# Altium PCB BMS Resistor Ladder Companion.PcbDoc
Units mm, origin at the board's own origin, x right, y up, seen from the top; angles counter-clockwise.
Board outline 50 x 75 mm, 2 copper layers (L1 - Primary, L2 - Secondary), stack 1.57 mm thick; 37 components, 34 nets, 123 pads, 0 vias.
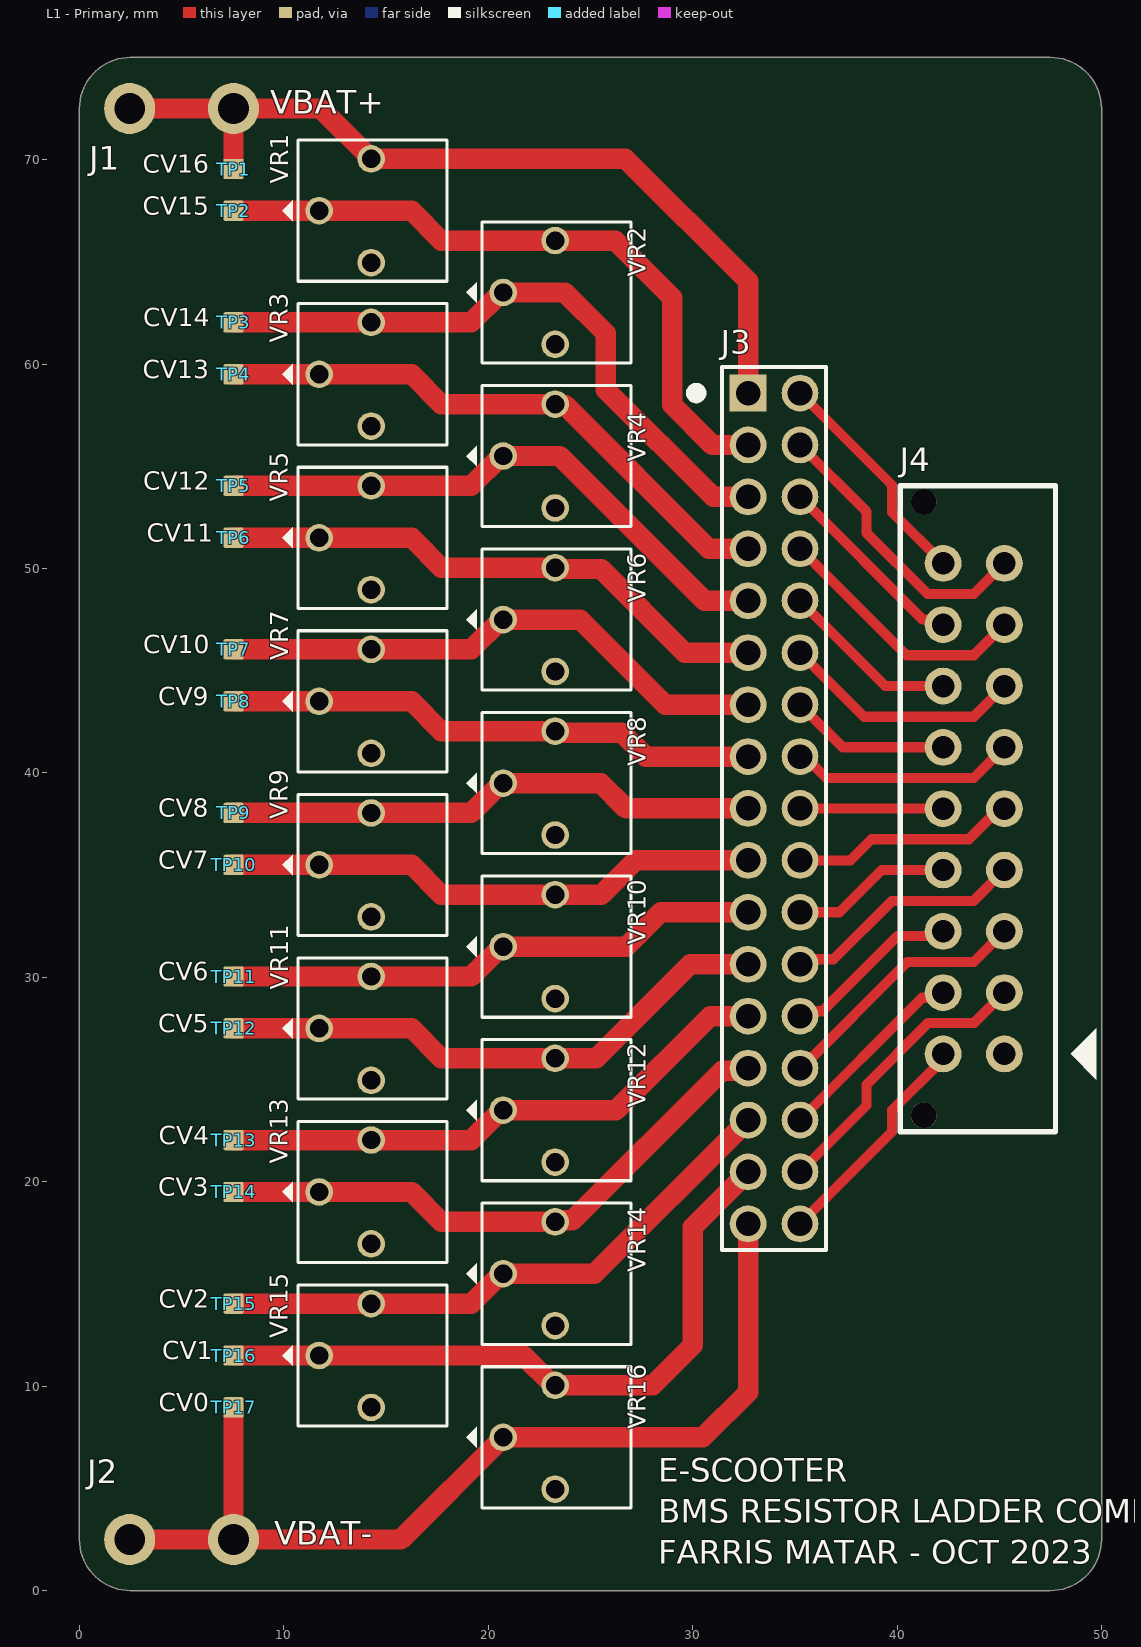
[diagram p0: L1 - Primary view]
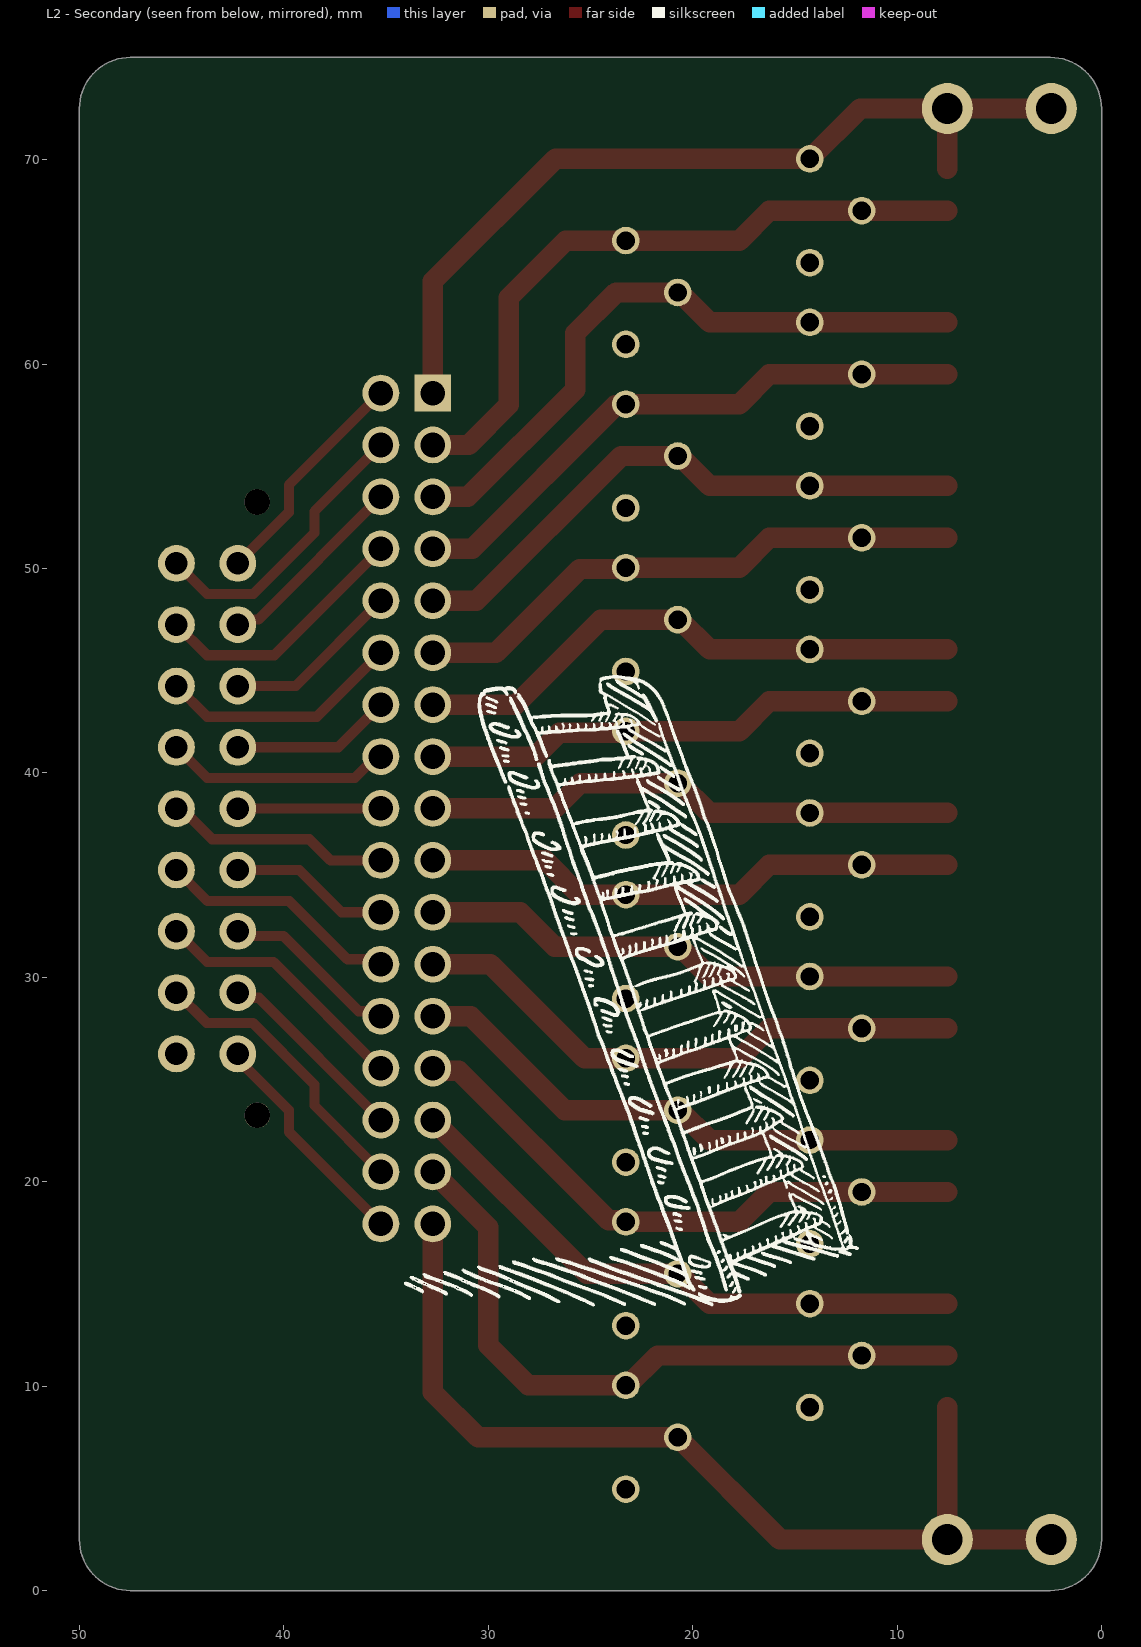
[diagram p1: L2 - Secondary view, seen from below]
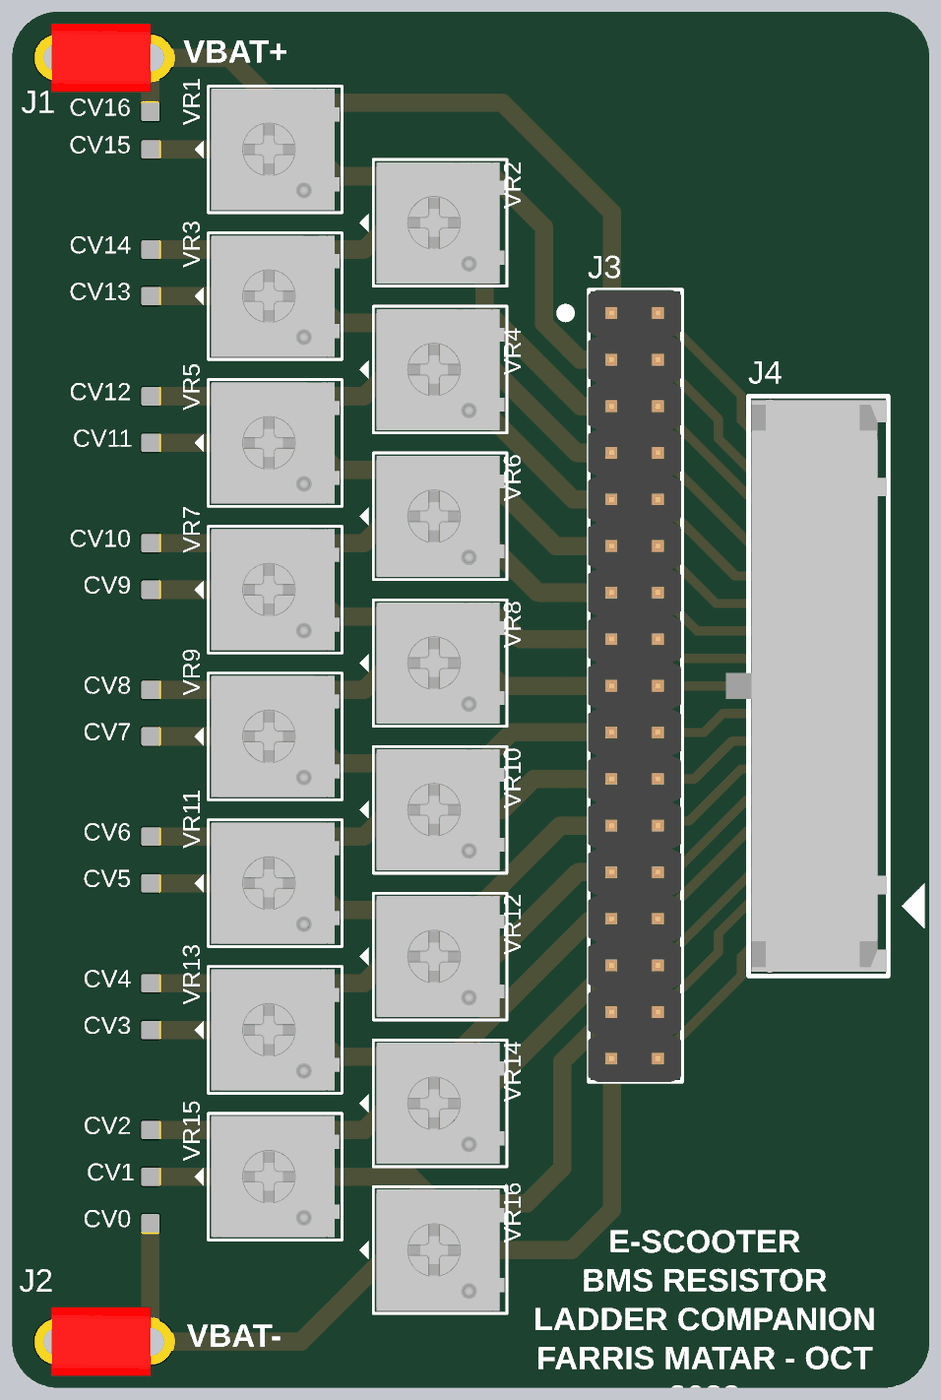
[diagram p2: 3D render of the assembled board from above, using the file's embedded part models]

## Layer stack, top to bottom
Top Solder: solder mask 0.0127, Solder Resist, Dk 3.8
L1 - Primary: signal copper 0.035
Dielectric: core 1.5, FR-4, Dk 4.5
L2 - Secondary: signal copper 0.035
Bottom Solder: solder mask 0.0127, Solder Resist, Dk 3.8

## Board outline
0,2.5 0,72.5 cw(c2.5,72.5) 2.5,75 47.5,75 cw(c47.5,72.5) 50,72.5 50,2.5 cw(c47.5,2.5) 47.5,0 2.5,0 cw(c2.5,2.5)

## Design rules (kind name [scope] priority, off if disabled: settings)
BoardOutlineClearance [All] p1: gap=0.2 ignorepadtopadclearanceinfootprint=FALSE
Clearance ClearanceNetTie [HasFootprint('NET_TIE') vs HasFootprint('NET_TIE')] p1: gap=0 ignorepadtopadclearanceinfootprint=FALSE
Clearance ClearanceTopLayer [OnLayer('L1 - Primary') Or IsVia Or IsThruPin vs OnLayer('L1 - Primary') Or IsVia Or IsThruPin] p2: gap=0.2 ignorepadtopadclearanceinfootprint=FALSE except(0.25: SMDPad-Hole Fill-Hole Poly-Hole Region-Hole Text-Hole; 0.254: Arc-Via Arc-Hole Track-Via Track-Hole Via-Fill Via-Poly Via-Region Fill-Fill Fill-Poly Fill-Region Poly-Poly Poly-Region Region-Region; 0.33: Arc-THPad Track-THPad THPad-Fill THPad-Poly THPad-Region; 0.5: SMDPad-THPad THPad-THPad THPad-Via THPad-Hole Via-Via Via-Hole)
Clearance ClearanceBottomLayer [OnLayer('L2 - Secondary') Or IsVia Or IsThruPin vs OnLayer('L2 - Secondary') Or IsVia Or IsThruPin] p3: gap=0.2 ignorepadtopadclearanceinfootprint=FALSE except(0.25: SMDPad-Hole Fill-Hole Poly-Hole Region-Hole Text-Hole; 0.254: Arc-Via Arc-Hole Track-Via Track-Hole Via-Fill Via-Poly Via-Region Fill-Fill Fill-Poly Fill-Region Poly-Poly Poly-Region Region-Region; 0.33: Arc-THPad Track-THPad THPad-Fill THPad-Poly THPad-Region; 0.5: SMDPad-THPad THPad-THPad THPad-Via THPad-Hole Via-Via Via-Hole)
ComponentClearance [All] p1: gap=0.102 collisioncheckmode=3 verticalgap=0.102 showdistances=TRUE
DiffPairsRouting [All] p1: maxlimit=0.203 minlimit=0.203 mostfreqgap=0.203 toplayer_minwidth=0.203 toplayer_maxwidth=1816.048 toplayer_prefwidth=0.203 bottomlayer_minwidth=0.203 bottomlayer_maxwidth=1816.048 bottomlayer_prefwidth=0.203 maxuncoupledlength=12.7
Height [All] p1: minheight=0 maxheight=1816.048 prefheight=12.7
HoleSize [All] p1: absolutevalues=TRUE maxlimit=6.3 minlimit=0.2 maxpercent=80.000 minpercent=20.000
HoleToHoleClearance [All] p1: gap=0.25 allowstackedmicrovias=FALSE
MinimumAnnularRing [All] p1: minimumring=0.076
MinimumSolderMaskSliver [All] p1: minsoldermaskwidth=0.1
PolygonConnect PolygonConnect_1 [HasFootprint('TESTPOINT_CIRCLE_1MM') OR HasFootprint('TESTPOINT_SQUARE_1MM')] p1: connectstyle=Direct reliefconductorwidth=0.254 reliefentries=4 polygonreliefangle="90 Angle" airgapwidth=0.254
PolygonConnect [All] p2: thpad.connectstyle=Relief thpad.reliefconductorwidth=0.254 thpad.reliefentries=4 thpad.polygonreliefangle="90 Angle" thpad.airgapwidth=0.254 smdpad.connectstyle=Relief smdpad.reliefconductorwidth=0.254 smdpad.reliefentries=4 smdpad.polygonreliefangle="90 Angle" smdpad.airgapwidth=0.254 via.connectstyle=Direct via.reliefconductorwidth=0.254 via.reliefentries=4 via.polygonreliefangle="90 Angle" via.airgapwidth=0.254
RoutingVias [All] p1: holewidth=0.2 width=0.45 viastyle="Through Hole" minholewidth=0.2 minwidth=0.45 maxholewidth=6.3 maxwidth=6.55
ShortCircuit ShortCircuitNetTie [InNet('CELL_V0') vs InNet('VBAT-')] p1: allowed=TRUE
ShortCircuit [All] p2: allowed=FALSE
SilkToSilkClearance [All] p1: silktosilkclearance=0
SilkToSolderMaskClearance [IsPad] p1: minsilkscreentomaskgap=0.102 clearancetoexposedcopper=TRUE
SolderMaskExpansion [All] p1: expansion=0.075 istentingtop=FALSE
Width [All] p1: maxlimit=1816.048 minlimit=0.203 preferedwidth=0.203 minimp=50.000000 maximp=50.000000 favimp=50.000000
21 further rules are at their usual default settings.

## Components (designator, comment, footprint, x,y, rotation, side; value= is the part's Value field where it differs from the comment)
J1 "105-1102-001" CINCH_BANANA_JACK_RED 5,72.5 r180 top
J2 "105-1103-001" CINCH_BANANA_JACK_RED 5,2.5 r180 top
J3 "HEADER 17X2" HEADER_2x17 33.98,38.26 r270 top
J4 "0430451827" MOLEX-0430451827 43.75,38.25 r90 top
TP1 "TESTPOINT_1MM_SQUARE" TESTPOINT_SQUARE_1MM 7.54,69.54 r90 top
TP2 "TESTPOINT_1MM_SQUARE" TESTPOINT_SQUARE_1MM 7.54,67.5 r90 top
TP3 "TESTPOINT_1MM_SQUARE" TESTPOINT_SQUARE_1MM 7.54,62.04 r180 top
TP4 "TESTPOINT_1MM_SQUARE" TESTPOINT_SQUARE_1MM 7.54,59.5 r180 top
TP5 "TESTPOINT_1MM_SQUARE" TESTPOINT_SQUARE_1MM 7.54,54.04 r180 top
TP6 "TESTPOINT_1MM_SQUARE" TESTPOINT_SQUARE_1MM 7.54,51.5 r180 top
TP7 "TESTPOINT_1MM_SQUARE" TESTPOINT_SQUARE_1MM 7.54,46.04 r180 top
TP8 "TESTPOINT_1MM_SQUARE" TESTPOINT_SQUARE_1MM 7.54,43.5 r180 top
TP9 "TESTPOINT_1MM_SQUARE" TESTPOINT_SQUARE_1MM 7.54,38.04 r180 top
TP10 "TESTPOINT_1MM_SQUARE" TESTPOINT_SQUARE_1MM 7.54,35.5 r180 top
TP11 "TESTPOINT_1MM_SQUARE" TESTPOINT_SQUARE_1MM 7.54,30.04 r180 top
TP12 "TESTPOINT_1MM_SQUARE" TESTPOINT_SQUARE_1MM 7.54,27.5 r180 top
TP13 "TESTPOINT_1MM_SQUARE" TESTPOINT_SQUARE_1MM 7.54,22.04 r180 top
TP14 "TESTPOINT_1MM_SQUARE" TESTPOINT_SQUARE_1MM 7.54,19.5 r180 top
TP15 "TESTPOINT_1MM_SQUARE" TESTPOINT_SQUARE_1MM 7.54,14.04 r180 top
TP16 "TESTPOINT_1MM_SQUARE" TESTPOINT_SQUARE_1MM 7.54,11.5 r180 top
TP17 "TESTPOINT_1MM_SQUARE" TESTPOINT_SQUARE_1MM 7.54,8.96 r90 top
VR1 "POT_10K_TRIM" TRIMPOT_3362 13,67.5 r270 top
VR2 "POT_10K_TRIM" TRIMPOT_3362 22,63.5 r270 top
VR3 "POT_10K_TRIM" TRIMPOT_3362 13,59.5 r270 top
VR4 "POT_10K_TRIM" TRIMPOT_3362 22,55.5 r270 top
VR5 "POT_10K_TRIM" TRIMPOT_3362 13,51.5 r270 top
VR6 "POT_10K_TRIM" TRIMPOT_3362 22,47.5 r270 top
VR7 "POT_10K_TRIM" TRIMPOT_3362 13,43.5 r270 top
VR8 "POT_10K_TRIM" TRIMPOT_3362 22,39.5 r270 top
VR9 "POT_10K_TRIM" TRIMPOT_3362 13,35.5 r270 top
VR10 "POT_10K_TRIM" TRIMPOT_3362 22,31.5 r270 top
VR11 "POT_10K_TRIM" TRIMPOT_3362 13,27.5 r270 top
VR12 "POT_10K_TRIM" TRIMPOT_3362 22,23.5 r270 top
VR13 "POT_10K_TRIM" TRIMPOT_3362 13,19.5 r270 top
VR14 "POT_10K_TRIM" TRIMPOT_3362 22,15.5 r270 top
VR15 "POT_10K_TRIM" TRIMPOT_3362 13,11.5 r270 top
VR16 "POT_10K_TRIM" TRIMPOT_3362 22,7.5 r270 top

## Footprints (in the part's own frame and the unit in brackets; to place one, negate y for a bottom-side part, rotate by r counter-clockwise, add the part's x,y. Pads: shape width x height; smd on the part's side, far side on the other; paste and mask are expansions set on the pad)
CINCH_BANANA_JACK_RED [mm]
  round 2.5 hole 1.5: 1(-2.54,0) 1(2.54,0)
  body extent -2.54,-1.87 2.84,1.87, height 5.16
HEADER_2x17 [mm]
  rect 1.8x1.8 hole 1.2: 1(-20.32,-1.27)
  round 1.8 hole 1.2: 2(-17.78,-1.27) 3(-15.24,-1.27) 4(-12.7,-1.27) 5(-10.16,-1.27) 6(-7.62,-1.27) 7(-5.08,-1.27) 8(-2.54,-1.27) 9(0,-1.27) 10(2.54,-1.27) 11(5.08,-1.27) 12(7.62,-1.27) 13(10.16,-1.27) 14(12.7,-1.27) 15(15.24,-1.27) 16(17.78,-1.27) 17(20.32,-1.27) 18(20.32,1.27) 19(17.78,1.27) 20(15.24,1.27) 21(12.7,1.27) 22(10.16,1.27) 23(7.62,1.27) 24(5.08,1.27) 25(2.54,1.27) 26(0,1.27) 27(-2.54,1.27) 28(-5.08,1.27) 29(-7.62,1.27) 30(-10.16,1.27) 31(-12.7,1.27) 32(-15.24,1.27) 33(-17.78,1.27) 34(-20.32,1.27)
  silkscreen extent -21.59,-4.06 21.59,2.54, body extent -21.59,-2.59 21.59,2.49, height 8.54
MOLEX-0430451827 [mm]
  round 1.8 hole 1.1: 1(-12,-1.5) 2(-9,-1.5) 3(-6,-1.5) 4(-3,-1.5) 5(0,-1.5) 6(3,-1.5) 7(6,-1.5) 8(9,-1.5) 9(12,-1.5) 10(-12,1.5) 11(-9,1.5) 12(-6,1.5) 13(-3,1.5) 14(0,1.5) 15(3,1.5) 16(6,1.5) 17(9,1.5) 18(12,1.5)
  round 1.25 hole 1.25 unplated mask+0.05: MH1(-15,2.45) MH2(15,2.45)
  silkscreen extent -15.8,-6 15.8,3.6, body extent -15.58,-3.94 15.58,4.83, height 9.9
TESTPOINT_SQUARE_1MM [mm]
  rrect20% 1x1 smd: 1(0,0)
TRIMPOT_3362 [mm]
  round 1.35 hole 0.9 mask+0.05: 1(-2.54,1.27) 2(0,-1.27) 3(2.54,1.27)
  silkscreen extent -3.45,-3.07 3.45,4.98, body extent -3.3,-2.15 3.3,4.84, height 4.71

## Part data
J1: library part CON_BANANA_RED_5A, "CONN TIP JACK SOLDER RED", Current Rating=5A, Manufacturer 1="Cinch Connectivity Solutions Johnson", Supplier Part Number 1=J576-ND, Manufacturer Part Number 1=105-1102-001, Supplier 1=Digi-Key
J2: library part CON_BANANA_BLACK_5A, "CONN TIP JACK SOLDER BLACK", Current Rating=5A, Manufacturer 1="Cinch Connectivity Solutions Johnson", Supplier Part Number 1=J577-ND, Manufacturer Part Number 1=105-1103-001, Supplier 1=Digi-Key
J3: "CONN HEADER VERT 34POS 2.54MM", Manufacturer 1="Würth Elektronik", Manufacturer Part Number 1=61303421121, Supplier Part Number 1=732-5308-ND, Supplier 1=Digi-Key
J4: library part CON_MOLEX-HDR_9x2_TH, "CONN HEADER VERT 18POS 3MM", Current Rating=5A, Manufacturer 1=Molex, Supplier Part Number 1=WM10723-ND, Voltage Rating=250VAC, Family="Micro-Fit 3.0", Manufacturer Part Number 1=0430451827, Pitch=3mm, Supplier 1=Digi-Key
TP1 TP2 TP3 TP4 TP5 TP6 TP7 TP8 TP9 TP10 TP11 TP12 TP13 TP14 TP15 TP16 TP17: "TESTPOINT 1MM SQUARE"
VR1 VR2 VR3 VR4 VR5 VR6 VR7 VR8 VR9 VR10 VR11 VR12 VR13 VR14 VR15 VR16: "TRIMMER 10K OHM 0.5W PC PIN TOP", Manufacturer 1="Bourns Inc.", Manufacturer Part Number 1=3362P-1-103LF, Resistance=10kΩ, Supplier Part Number 1=3362P-103LF-ND, Supplier 1=Digi-Key

## Nets (pads, with @x,y where several pads share a name; then routed paths per layer and width w, separated by ;. In a path a pad name is that pad's centre, name@x,y a point inside that pad or via, vN(x,y) a via of type N, cw(c..) or ccw(c..) an arc to the next point about the centre after c; other vN are vias at no path point)
CELL_V0: J3.18 J4.10 | length 11.2
  L1 - Primary w0.5: J3.18 39.75,22.44 39.75,23.5 42.25,26 J4.10
CELL_V1: J3.19 J4.2 | length 14.2
  L1 - Primary w0.5: J3.19 38.5,23.73 38.5,24.75 41.52,27.77 43.77,27.77 J4.2
CELL_V2: J3.20 J4.11 | length 9.6
  L1 - Primary w0.5: J3.20 41.231,29.001 42.001,29.001 J4.11
CELL_V3: J3.21 J4.3 | length 12.8
  L1 - Primary w0.5: J3.21 35.31,25.56 40.5,30.75 43.75,30.75 J4.3
CELL_V4: J3.22 J4.12 | length 8.7
  L1 - Primary w0.5: J3.22 35.492,28.342 36.342,28.342 40.025,32.025 42.025,32.025 J4.12
CELL_V5: J3.23 J4.4 | length 11.9
  L1 - Primary w0.5: J3.23 35.499,30.889 36.889,30.889 39.73,33.73 43.73,33.73 J4.4
CELL_V6: J3.24 J4.13 | length 7.9
  L1 - Primary w0.5: J3.24 37.18,33.18 39.25,35.25 J4.13
CELL_V7: J3.25 J4.5 | length 11
  L1 - Primary w0.5: J3.25 37.72,35.72 38.75,36.75 43.5,36.75 45,38.25 J4.5
CELL_V8: J3.26 J4.14 | length 7
  L1 - Primary w0.5: J3.26 35.255,38.255 42.245,38.255 J4.14
CELL_V9: J3.27 J4.6 | length 11.1
  L1 - Primary w0.5: J3.27 35.483,40.8 36.533,39.75 43.75,39.75 J4.6
CELL_V10: J3.28 J4.15 | length 7.9
  L1 - Primary w0.5: J3.28 37.34,41.25 J4.15
CELL_V11: J3.29 J4.7 | length 11.9
  L1 - Primary w0.5: J3.29 38.38,42.75 43.75,42.75 J4.7
CELL_V12: J3.30 J4.16 | length 8.7
  L1 - Primary w0.5: J3.30 39.42,44.25 J4.16
CELL_V13: J3.31 J4.8 | length 12.8
  L1 - Primary w0.5: J3.31 40.46,45.75 43.75,45.75 J4.8
CELL_V14: J3.32 J4.17 | length 9.6
  L1 - Primary w0.5: J3.32 41.251,47.499 42.001,47.499 J4.17
CELL_V15: J3.33 J4.9 | length 14.3
  L1 - Primary w0.5: J3.33 38.499,52.791 38.499,51.751 41.5,48.75 43.75,48.75 J4.9
CELL_V16: J3.34 J4.18 | length 11.2
  L1 - Primary w0.5: J3.34 39.75,54.08 39.75,52.75 J4.18
POT_CV0: J2.1 J3.17 TP17.1 VR16.2 | length 47.9
  L1 - Primary w1: J2.1@2.46,2.5 J2.1@7.54,2.5 ; TP17.1 J2.1@7.54,2.5 ; J3.17 32.71,9.71 30.5,7.5 VR16.2 15.73,2.5 J2.1@7.54,2.5
POT_CV1: J3.16 TP16.1 VR15.2 VR16.1 | length 33.5
  L1 - Primary w1: TP16.1 VR15.2 21.715,11.5 23.175,10.04 VR16.1 28.04,10.04 30,12 30,17.77 J3.16
POT_CV2: J3.15 TP15.1 VR14.2 VR15.1 | length 28.9
  L1 - Primary w1: TP15.1 VR15.1 19.175,14.04 20.635,15.5 VR14.2 25.19,15.5 J3.15
POT_CV3: J3.14 TP14.1 VR13.2 VR14.1 | length 28.9
  L1 - Primary w1: TP14.1 VR13.2 16.25,19.5 17.71,18.04 VR14.1 23.337,18.107 24.107,18.107 31.438,25.438 32.588,25.438 J3.14
POT_CV4: J3.13 TP13.1 VR12.2 VR13.1 | length 27.7
  L1 - Primary w1: TP13.1 VR13.1 19.175,22.04 20.635,23.5 VR12.2 26.25,23.5 30.85,28.1 J3.13
POT_CV5: J3.12 TP12.1 VR11.2 VR12.1 | length 27.7
  L1 - Primary w1: TP12.1 VR11.2 16.25,27.5 17.71,26.04 VR12.1 25.29,26.04 29.89,30.64 J3.12
POT_CV6: J3.11 TP11.1 VR10.2 VR11.1 | length 26.4
  L1 - Primary w1: TP11.1 VR11.1 19.175,30.04 VR10.2@20.635,31.5 ; VR10.2 26.75,31.5 28.43,33.18 J3.11
POT_CV7: J3.10 TP10.1 VR9.2 VR10.1 | length 26.5
  L1 - Primary w1: TP10.1 VR9.2 16.25,35.5 17.71,34.04 VR10.1 25.54,34.04 27.22,35.72 J3.10
POT_CV8: J3.9 TP9.1 VR8.2 VR9.1 | length 26.2
  L1 - Primary w1: TP9.1 VR9.1 19.175,38.04 VR8.2@20.635,39.5 ; VR8.2 25.5,39.5 26.74,38.26 J3.9
POT_CV9: J3.8 TP8.1 VR7.2 VR8.1 | length 26.3
  L1 - Primary w1: TP8.1 VR7.2 16.25,43.5 17.71,42.04 VR8.1 23.337,41.973 26.527,41.973 27.7,40.8 J3.8
POT_CV10: J3.7 TP7.1 VR6.2 VR7.1 | length 27.4
  L1 - Primary w1: TP7.1 VR7.1 19.175,46.04 VR6.2@20.635,47.5 ; VR6.2 24.5,47.5 28.66,43.34 J3.7
POT_CV11: J3.6 TP6.1 VR5.2 VR6.1 | length 27.5
  L1 - Primary w1: TP6.1 VR5.2 16.25,51.5 17.71,50.04 VR6.1 23.337,49.973 25.527,49.973 29.62,45.88 J3.6
POT_CV12: J3.5 TP5.1 VR4.2 VR5.1 | length 28.6
  L1 - Primary w1: TP5.1 VR5.1 19.175,54.04 VR4.2@20.635,55.5 ; VR4.2 23.5,55.5 30.58,48.42 J3.5
POT_CV13: J3.4 TP4.1 VR3.2 VR4.1 | length 28.7
  L1 - Primary w1: TP4.1 VR3.2 16.25,59.5 17.71,58.04 VR4.1 23.337,57.973 23.777,57.973 30.79,50.96 J3.4
POT_CV14: J3.3 TP3.1 VR2.2 VR3.1 | length 31.4
  L1 - Primary w1: TP3.1 VR3.1 19.175,62.04 VR2.2@20.635,63.5 ; VR2.2 23.75,63.5 25.75,61.5 25.75,58.75 31,53.5 J3.3
POT_CV15: J3.2 TP2.1 VR1.2 VR2.1 | length 33
  L1 - Primary w1: TP2.1 VR1.2 16.25,67.5 17.71,66.04 VR2.1 26.21,66.04 29,63.25 29,58 30.96,56.04 J3.2
POT_CV16: J1.1 J3.1 TP1.1 VR1.1 | length 42.2
  L1 - Primary w1: J1.1@2.46,72.5 J1.1@7.54,72.5 ; TP1.1 J1.1@7.54,72.5 ; J3.1 32.71,64.04 26.71,70.04 VR1.1 11.81,72.5 J1.1@7.54,72.5
pads on no net: J4.1 J4.MH1 J4.MH2 VR1.3 VR2.3 VR3.3 VR4.3 VR5.3 VR6.3 VR7.3 VR8.3 VR9.3 VR10.3 VR11.3 VR12.3 VR13.3 VR14.3 VR15.3 VR16.3

## Silkscreen, mask and mechanical layers (free items; w line width, h text height)
Top Overlay:
  text "VBAT+" at 9.328,71.859 h2
  text "CV16" at 3.11,69.052 h1.52
  text "CV15" at 3.103,67.012 h1.52
  text "CV14" at 3.114,61.552 h1.52
  text "CV13" at 3.11,59.012 h1.52
  text "CV12" at 3.12,53.552 h1.52
  text "CV11" at 3.299,51.012 h1.52
  text "CV10" at 3.113,45.552 h1.52
  text "CV9" at 3.867,43.012 h1.52
  text "CV8" at 3.867,37.552 h1.52
  text "CV7" at 3.868,35.012 h1.52
  text "CV6" at 3.868,29.552 h1.52
  text "CV5" at 3.861,27.012 h1.52
  text "CV4" at 3.872,21.552 h1.52
  text "CV3" at 3.868,19.012 h1.52
  text "CV2" at 3.878,13.552 h1.52
  text "CV1" at 4.057,11.012 h1.52
  text "CV0" at 3.871,8.472 h1.52
  text "VBAT-" at 9.522,1.859 h2
  text "E-SCOOTER / BMS RESISTOR LADDER COMPANION / FARRIS MATAR - OCT 2023" at 28.308,0.922 h2
Bottom Overlay:
  drawing of 88 lines, arcs and shapes, not listed
Mechanical 1:
  the board outline again, w0.254